# Altium PCB PCB3_TH.PcbDoc
Units mil, origin at the board's own origin, x right, y up, seen from the top; angles counter-clockwise.
Board outline 2365.99 x 2745.01 mil, 2 copper layers (Top Layer, Bottom Layer); 18 components, 13 nets, 87 pads, 2 vias.
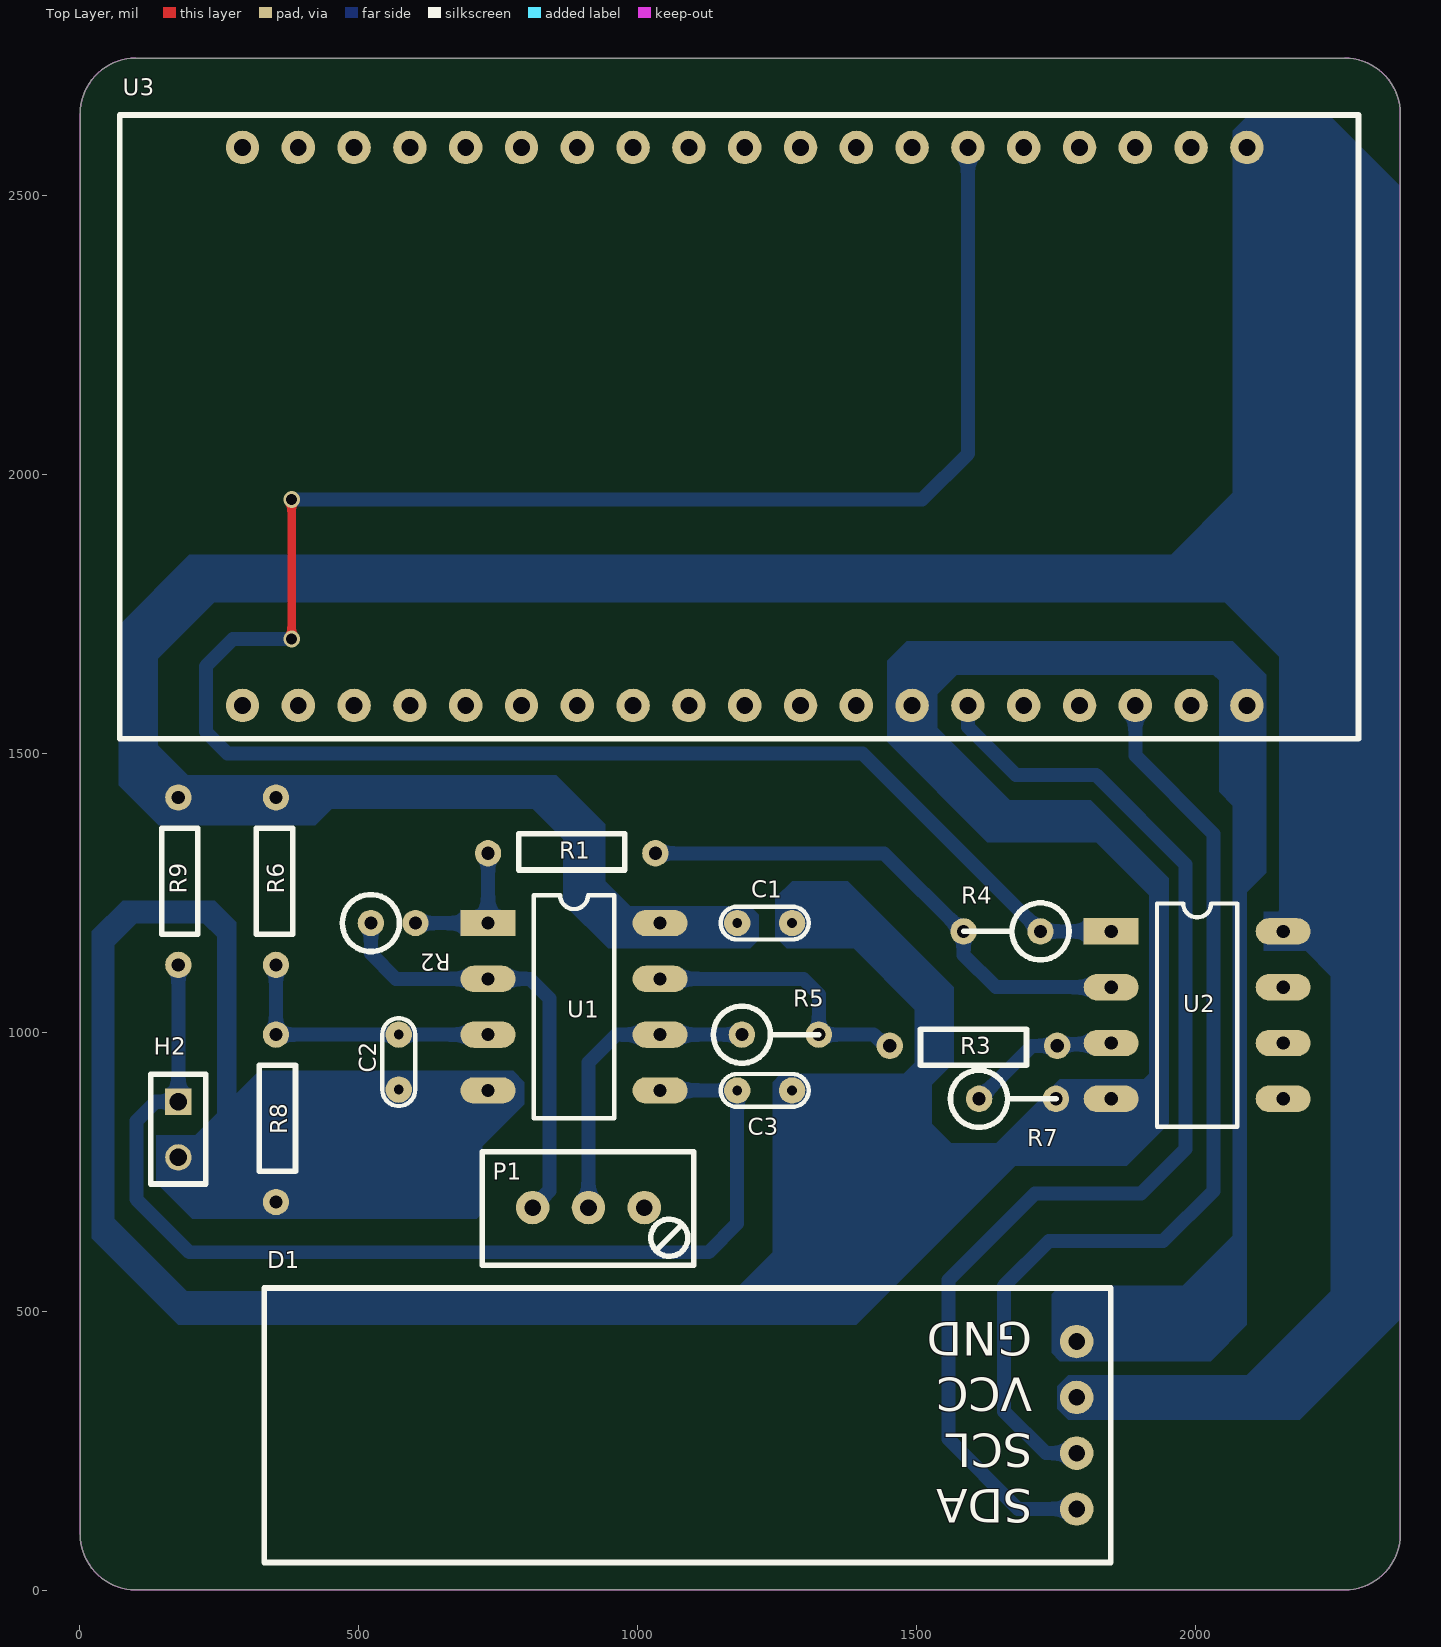
[diagram p0: Top Layer view]
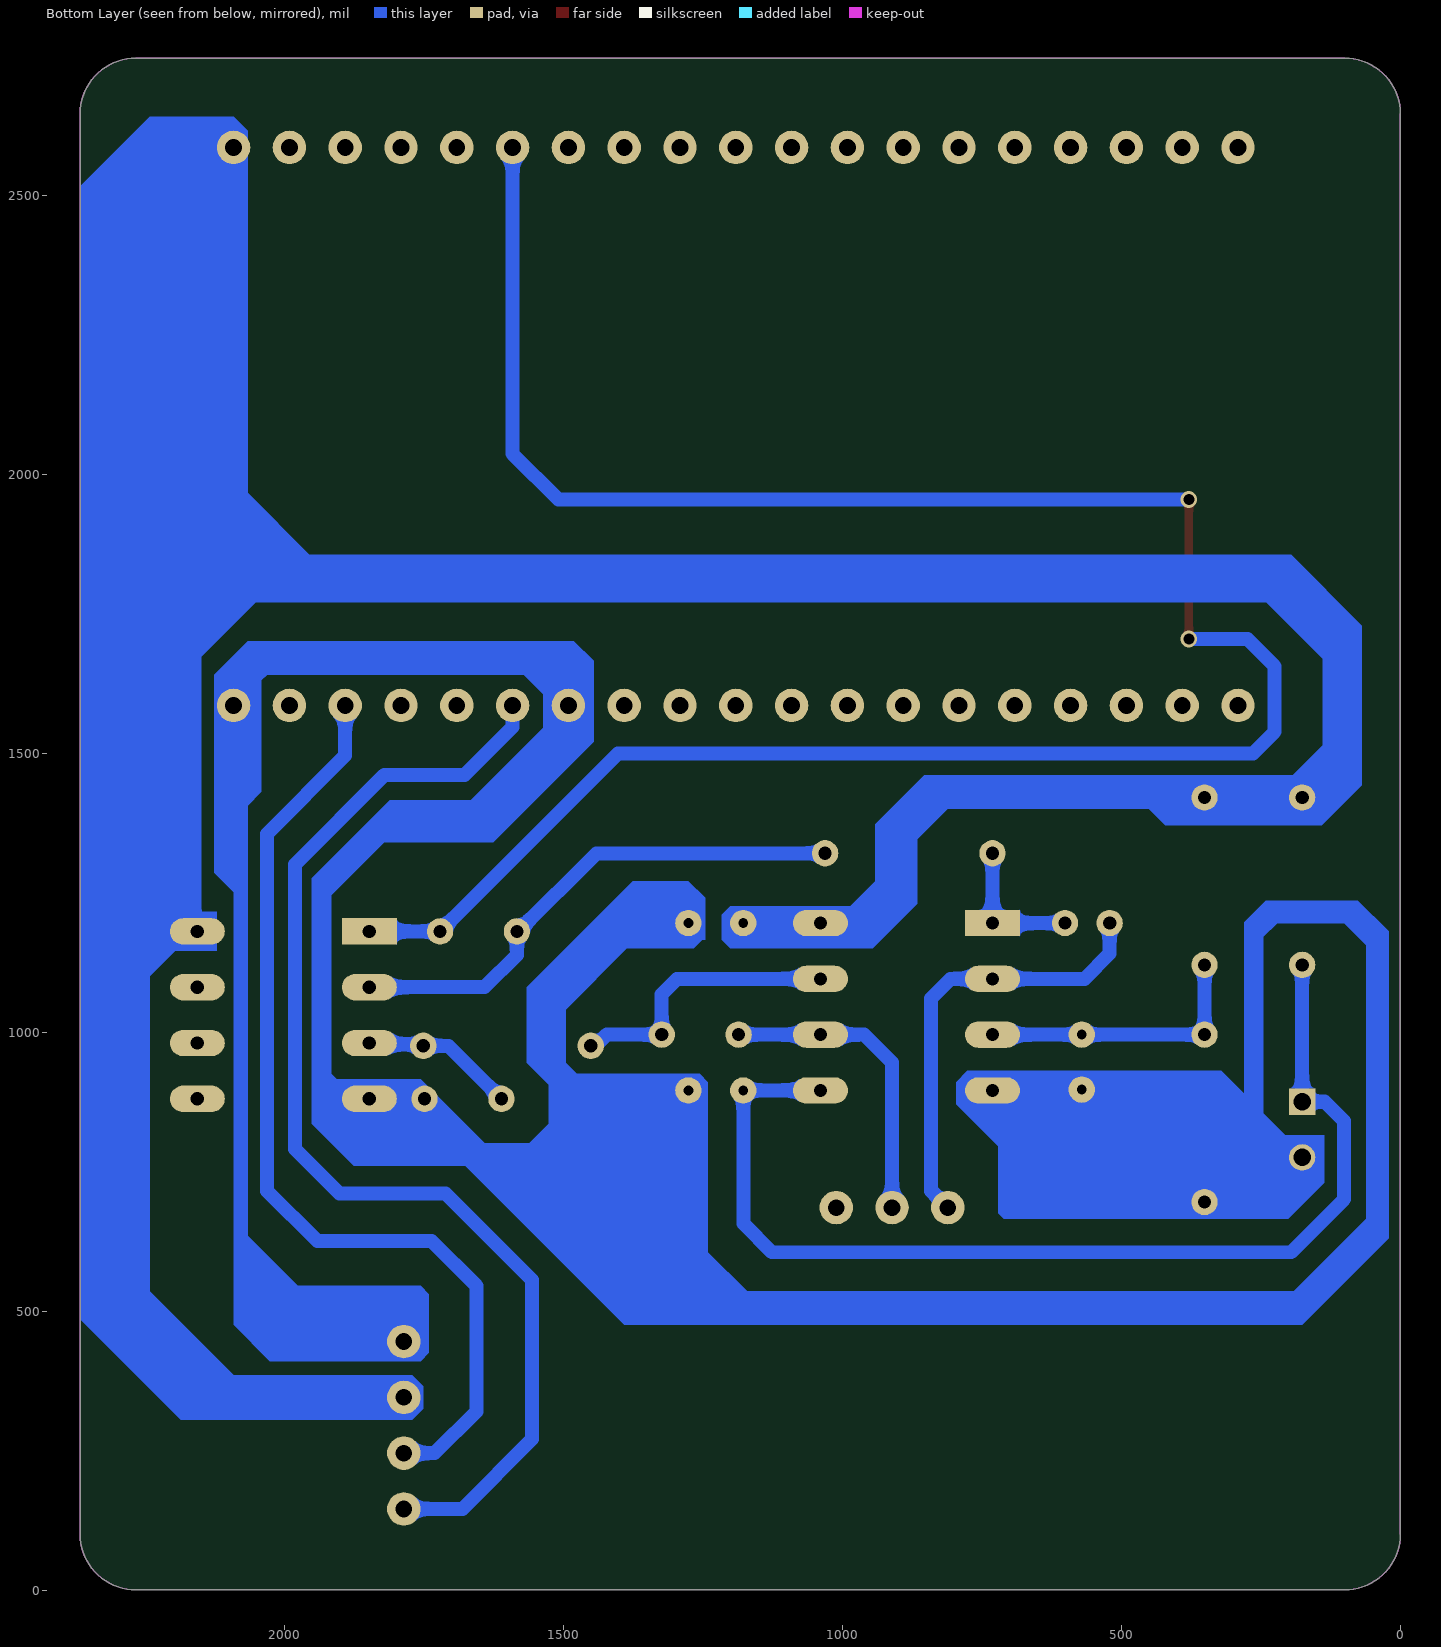
[diagram p1: Bottom Layer view, seen from below]
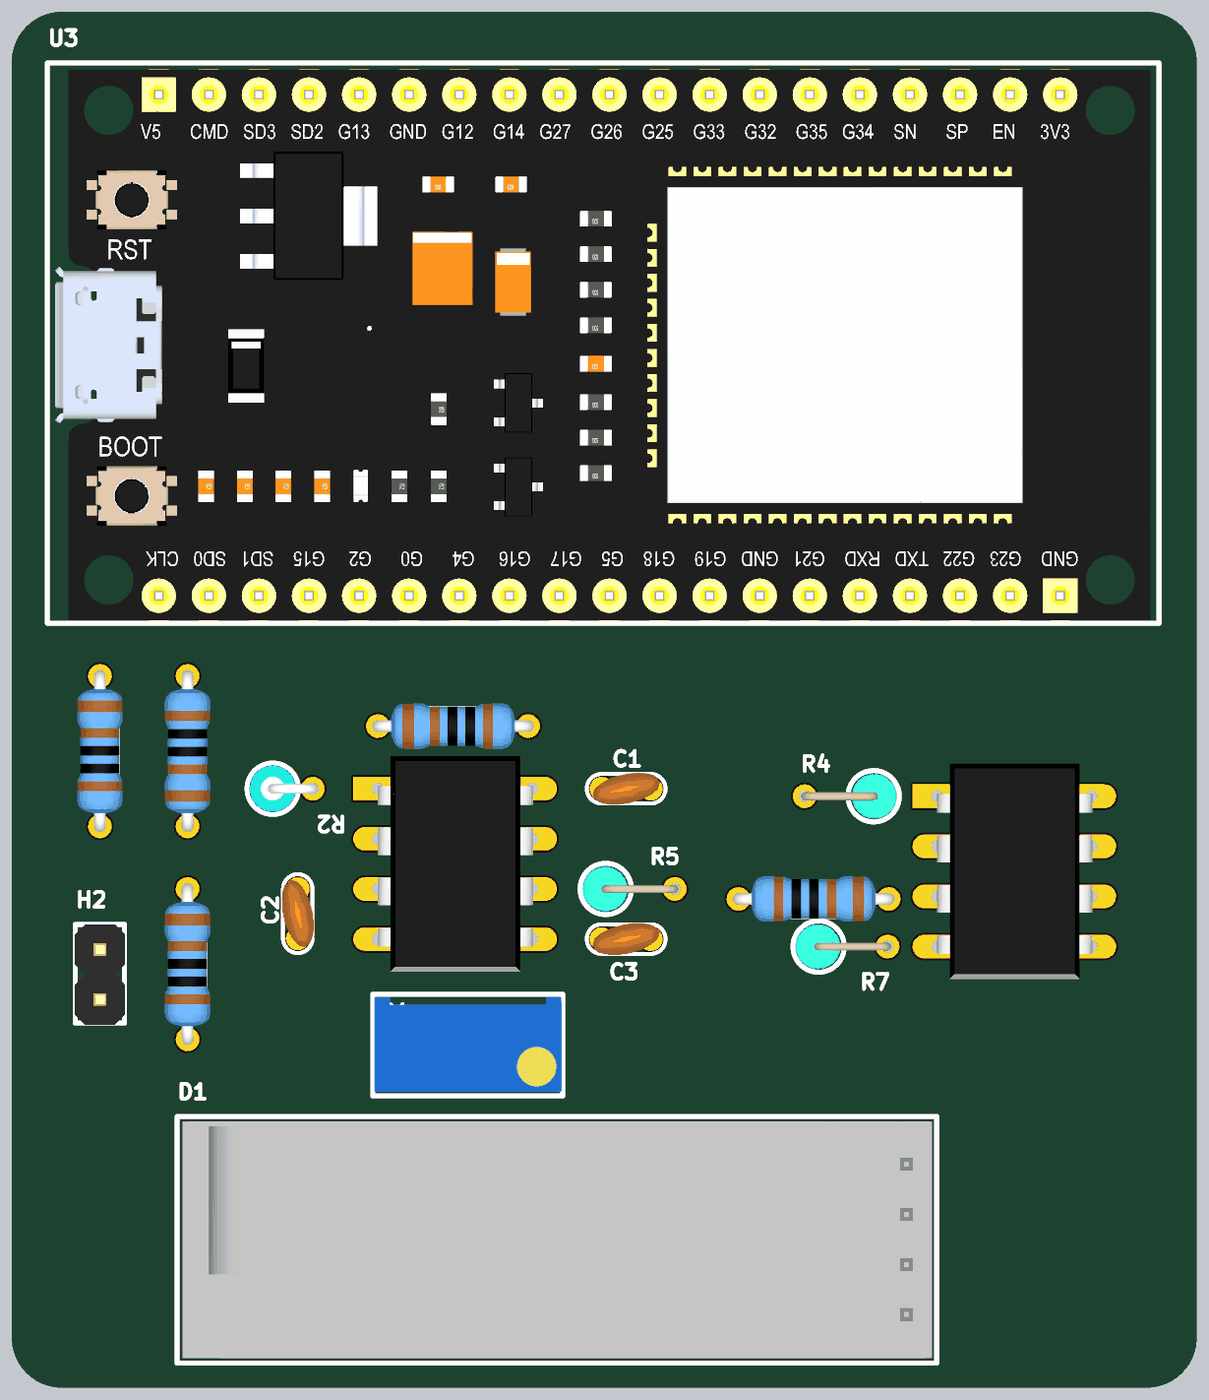
[diagram p2: 3D render of the assembled board from above, using the file's embedded part models]

## Layer stack, top to bottom
Top Solder: solder mask 0.4, Solder Resist, Dk 3.5
Top Layer: signal copper 1.4
Dielectric 1: dielectric 12.6, FR-4, Dk 4.8
Bottom Layer: signal copper 1.4
Bottom Solder: solder mask 0.4, Solder Resist, Dk 3.5

## Board outline
0.98,100.98 0.98,2645.99 cw(c100.98,2645.99) 100.98,2745.99 2266.98,2745.99 cw(c2266.98,2645.99) 2366.98,2645.99 2366.98,100.98 cw(c2266.98,100.98) 2266.98,0.98 100.98,0.98 cw(c100.98,100.98)

## Design rules (kind name [scope] priority, off if disabled: settings)
Clearance [All] p1: gap=10 ignorepadtopadclearanceinfootprint=FALSE except(0: Arc-Hole Track-Hole SMDPad-Hole THPad-Hole Via-Hole Fill-Hole Poly-Hole Region-Hole Text-Hole)
PolygonConnect [All] p1: connectstyle=Relief reliefconductorwidth=10 reliefentries=4 polygonreliefangle="90 Angle" airgapwidth=10
RoutingVias [All] p1: holewidth=28 width=50 viastyle="Through Hole" minholewidth=28 minwidth=50 maxholewidth=28 maxwidth=50
SolderMaskExpansion [All] p1: expansion=4 istentingtop=FALSE
Width Width_1 [All] p1: maxlimit=30 minlimit=10 preferedwidth=20 minimp=50.000000 maximp=50.000000 favimp=50.000000
Width [All] p2: maxlimit=10 minlimit=10 preferedwidth=10
30 further rules are at their usual default settings.

## Components (designator, comment, footprint, x,y, rotation, side; value= is the part's Value field where it differs from the comment)
C1 "1uF" Cap-Rad-Cer-D3.5-L1.5-P2.5 1178.54,1195.98 r0 top
C2 "100nF" Cap-Rad-Cer-D3.5-L1.5-P2.5 571.97,897.56 r90 top
C3 "100nF" Cap-Rad-Cer-D3.5-L1.5-P2.5 1276.97,895.98 r180 top
D1 "SSD1306-0.96-128X32-I2C" SSD1306-0.96-12832-I2C 1786.97,295.98 r90 top
H2 "CONN-2P" HDR-M-2.54-2P 176.97,875.98 r270 top
P1 "10K" 3296X 911.97,685.98 r0 top
R1 "8.2K" "Res Axial 0.3" 1031.97,1320.98 r180 top
R2 "3.9K" "Res Axial 0.3 Vertical"#1 521.97,1195.98 r0 top
R3 "8.2K" "Res Axial 0.3" 1451.97,975.98 r0 top
R4 "47K" "Res Axial 0.3 Vertical"#2 1721.97,1180.98 r180 top
R5 "3.9K" "Res Axial 0.3 Vertical"#2 1186.97,995.98 r0 top
R6 "3.3k" "Res Axial 0.3" 351.97,1420.98 r270 top
R7 "47K" "Res Axial 0.3 Vertical"#2 1611.97,880.98 r0 top
R8 "82R" "Res Axial 0.3" 351.97,695.98 r90 top
R9 "3.3K" "Res Axial 0.3" 176.97,1120.98 r90 top
U1 "LM358" DIP8 731.97,1195.98 r0 top
U2 "LM358" DIP8 1848.7,1180.98 r0 top
U3 "ESP32-DEV-KIT" ESP32-WROOM-32-38PIN 291.97,2085.98 r270 top

## Footprints (in the part's own frame and the unit in brackets; to place one, negate y for a bottom-side part, rotate by r counter-clockwise, add the part's x,y. Pads: shape width x height; smd on the part's side, far side on the other; paste and mask are expansions set on the pad)
3296X [mil]
  round 60 hole 30: 1(100,0) 2(0,0) 3(-100,0)
  silkscreen extent -190,-103 189,100, body extent -187,-94 187,94, height 453
Cap-Rad-Cer-D3.5-L1.5-P2.5 [mm]
  round 1.2 hole 0.45: 1(0,0) 2(2.5,0)
  silkscreen extent -0.75,-0.75 3.25,0.75, body extent -0.6,-1.1 3.14,1.1, height 3.8
DIP8 [mm]
  rect 2.5x1.2 hole 0.6: 1(0,0)
  oval 2.5x1.2 hole 0.6: 2(0,-2.54) 3(0,-5.08) 4(0,-7.62) 5(7.83,-7.62) 6(7.83,-5.08) 7(7.83,-2.54) 8(7.83,0)
  silkscreen extent 2.08,-8.89 5.74,1.27, body extent 0,-9.27 7.87,1.65, height 5.08
ESP32-WROOM-32-38PIN [mil]
  round 60 hole 30: 1(-500,1800) 2(-500,1700) 3(-500,1600) 4(-500,1500) 5(-500,1400) 6(-500,1300) 7(-500,1200) 8(-500,1100) 9(-500,1000) 10(-500,900) 11(-500,800) 12(-500,700) 13(-500,600) 14(-500,500) 15(-500,400) 16(-500,300) 17(-500,200) 18(-500,100) 19(-500,0) 20(500,0) 21(500,100) 22(500,200) 23(500,300) 24(500,400) 25(500,500) 26(500,600) 27(500,700) 28(500,800) 29(500,900) 30(500,1000) 31(500,1100) 32(500,1200) 33(500,1300) 34(500,1400) 35(500,1500) 36(500,1600) 37(500,1700) 38(500,1800)
  silkscreen extent -558,-220 560,2000, body extent -545,-205 555,1983, height 299
HDR-M-2.54-2P [mm]
  rect 1.2x1.2 hole 0.8: 1(0,0)
  round 1.2 hole 0.8: 2(2.54,0)
  silkscreen extent -1.25,-1.25 3.75,1.25, body extent -1.25,-1.27 3.83,1.27, height 8.74
"Res Axial 0.3" [mm]
  round 1.2 hole 0.6: 1(0,0) 2(7.62,0)
  silkscreen extent 1.4,-0.89 6.22,0.76, body extent -0.3,-1.15 7.92,1.15, height 2.3
"Res Axial 0.3 Vertical"#1 [mm]
  round 1.2 hole 0.6: 1(0,0) 2(2.032,0)
  silkscreen extent -1.3,-1.3 1.3,1.3, body extent -1.2,-1.2 2.28,1.2, height 11.61
"Res Axial 0.3 Vertical"#2 [mm]
  round 1.2 hole 0.6: 1(0,0) 2(3.5,0)
  silkscreen extent -1.3,-1.3 3.5,1.3, body extent -1.27,-1.15 3.67,1.15, height 7.72
SSD1306-0.96-12832-I2C [mil]
  round 60 hole 30: 1(-150,0) 2(-50,0) 3(50,0) 4(150,0)
  silkscreen extent -246,-61 246,1456, body extent -236,-51 236,1445, height 248

## Part data
C1 C2 C3: library part CAP-CER, "Ceramic Capacitor"
D1: "SSD1306-0.96inch 128X32 I2C 4P", ComponentLink1Description=WEO012832DWPP3N00008, ComponentLink1URL=https://www.winstar.com.tw/d/447/WEO012832DWPP3N00008.pdf
H2: "Connector 2 Pole"
P1: library part 3296x, "Potentionmeter", ComponentLink1Description="3296x Potentionmeter Square Trimpot Series", ComponentLink1URL=https://www.bourns.com/docs/product-datasheets/3296.pdf
R1 R2 R3 R4 R5 R6 R7 R8 R9: library part Resistor, "Resistor"
U1 U2: "Low-power dual Operational Amplifier", ComponentLink1Description="LM358M Datasheets", ComponentLink1URL=https://www.ti.com/general/docs/suppproductinfo.tsp?distId=10&gotoUrl=https%3A%2F%2Fwww.ti.com%2Flit%2Fgpn%2Flm158-n
U3: library part ESP32-DEVKIT, "ESP32 Dev Kit module 38 Pin"

## Via types
v1: diameter 30, hole 20, Top Layer to Bottom Layer, 2 vias

## Nets (pads, with @x,y where several pads share a name; then routed paths per layer and width w, separated by ;. In a path a pad name is that pad's centre, name@x,y a point inside that pad or via, vN(x,y) a via of type N, cw(c..) or ccw(c..) an arc to the next point about the centre after c; other vN are vias at no path point)
+5: C1.1 D1.3 R6.1 R9.2 U1.8 U2.8 U3.1 | length 3911.9
  Bottom Layer w15: R9.2 R6.1 861.97,1420.98 911.97,1370.98 911.97,1250.98 966.97,1195.98 U1.8 C1.1 ; D1.3 2146.97,345.98 2256.97,455.98 2256.97,1137.2 2215.48,1178.68 2159.27,1178.68 U2.8 2156.97,1995.98 2091.97,2060.98 U3.1
GND: C1.2 C2.1 C3.1 D1.4 H2.2 R7.2 R8.1 U1.4 U2.4 U3.32 U3.38
NetC2_2: C2.2 R6.2 R8.2 U1.3 | length 514.3
  Top Layer w15: C2.2@571.97,989.41 C2.2@575.26,992.7 ; U1.3@728.68,992.7 U1.3
  Bottom Layer w25: R6.2 R8.2 C2.2 U1.3
NetC3_2: C3.2 H2.1 R9.1 U1.5 | length 1988.5
  Bottom Layer w25: R9.1 H2.1 136.97,875.98 101.97,840.98 101.97,700.98 196.97,605.98 1126.97,605.98 1178.54,657.56 C3.2 U1.5
NetD1_1: D1.1 U3.33 | length 2134.6
  Bottom Layer w25: U3.33@1595.48,1582.47 U3.33 1591.97,1547.55 1678.53,1460.98 1821.97,1460.98 1981.97,1300.98 1981.97,790.98 1901.97,710.98 1711.97,710.98 1556.97,555.98 1556.97,270.98 1681.97,145.98 D1.1
NetD1_2: D1.2 U3.36 | length 1759.5
  Bottom Layer w25: D1.2 1731.97,245.98 1656.97,320.98 1656.97,545.98 1736.97,625.98 1941.97,625.98 2031.97,715.98 2031.97,1355.98 1891.97,1495.98 U3.36
NetP1_2: P1.2 R5.1 U1.6 | length 555.7
  Bottom Layer w25: P1.2 911.97,945.98 961.97,995.98 U1.6 R5.1
NetP1_3: P1.3 R2.1 U1.2 | length 805.6
  Bottom Layer w15: P1.3 P1.3@811.97,695.98
  Bottom Layer w25: R2.1 521.97,1140.98 566.97,1095.98 U1.2 806.97,1095.98 841.97,1060.98 841.97,715.98 P1.3
NetR1_1: R1.1 R4.2 U2.2 | length 945.9
  Bottom Layer w25: R1.1 1441.97,1320.98 1581.97,1180.98 R4.2 ; R4.2@1584.17,1185.98 1584.17,1138.78 1641.97,1080.98 U2.2
NetR1_2: R1.2 R2.2 U1.1 | length 255
  Bottom Layer w25: R2.2 U1.1 R1.2
NetR3_1: R3.1 R5.2 U1.7 | length 503.7
  Bottom Layer w25: U1.7 1296.97,1095.98 1324.76,1068.19 R5.2 1423.24,995.98 1443.24,975.98 R3.1
NetR3_2: R3.2 R7.1 U2.3 | length 278.2
  Top Layer w15: R3.2 R3.2@1754.47,978.48 ; U2.3@1846.2,978.48 U2.3
  Bottom Layer w25: R7.1 1706.97,975.98 R3.2 ; R3.2@1754.47,978.48 U2.3@1846.2,978.48
NetR4_1: R4.1 U2.1 U3.6 | length 4114.1
  Top Layer w15: v1(380,1705) v1(380,1955) ; U2.1@1843.7,1185.98 U2.1
  Bottom Layer w25: v1(380,1705) 275,1705 226.21,1656.21 226.21,1538.79 265,1500 1402.95,1500 R4.1 U2.1 ; v1(380,1955) 1510,1955 1591.97,2036.97 U3.6
pads on no net: P1.1 U2.5 U2.6 U2.7 U3.2 U3.3 U3.4 U3.5 U3.7 U3.8 U3.9 U3.10 U3.11 U3.12 U3.13 U3.14 U3.15 U3.16 U3.17 U3.18 U3.19 U3.20 U3.21 U3.22 U3.23 U3.24 U3.25 U3.26 U3.27 U3.28 U3.29 U3.30 U3.31 U3.34 U3.35 U3.37

## Keep-outs
Keep-Out Layer:
  the board outline again, w1.97

## Other copper
Bottom Layer:
  region net GND: 1741.97,425.98 1756.97,410.98 2026.97,410.98 2091.97,475.98 2091.97,1250.98 2126.97,1285.98 2126.97,1500.98 2056.97,1500.98 2041.97,1515.98 2041.97,1430.98 2066.97,1405.98 2066.97,635.98 1976.97,545.98 1756.97,545.98 1741.97,530.98
  region net GND: 1246.97,1240.98 1246.97,1165.98 1251.97,1165.98 1266.97,1150.98 1386.97,1150.98 1496.97,1040.98 1496.97,945.98 1476.97,925.98 1256.97,925.98 1241.97,910.98 1241.97,605.98 1170.98,535 1375.98,535 1641.97,800.98 1561.97,800.98 1526.97,835.98 1526.97,905.98 1566.97,945.98 1566.97,1080.98 1376.97,1270.98 1276.97,1270.98
  region net GND: 1536.97,1545.98 1666.97,1415.98 1811.97,1415.98 1951.97,1275.98 1951.97,835.98 1876.97,760.98 1676.97,760.98 1391.97,475.98 176.97,475.98 21.97,630.98 21.97,1180.98 76.97,1235.98 241.97,1235.98 280.37,1197.58 280.37,879.38 246.97,845.98 246.97,1170.98 221.97,1195.98 101.97,1195.98 61.97,1155.98 61.97,665.98 191.97,535.98 1376.97,535.98 1696.97,855.98 1756.97,915.98 1906.97,915.98 1916.97,925.98 1916.97,1245.98 1821.97,1340.98 1626.97,1340.98 1446.97,1520.98 1446.97,1545.98
  region net GND: 2126.97,1500.98 2126.97,1640.98 2066.97,1700.98 1481.97,1700.98 1446.97,1665.98 1446.97,1545.98 1466.97,1525.98 1471.97,1530.98 1521.97,1530.98 1536.97,1545.98 1536.97,1605.98 1571.97,1640.98 2031.97,1640.98 2041.97,1630.98 2041.97,1515.98 2056.97,1500.98
  region net GND: 776.97,930.98 796.97,910.98 796.97,870.98 721.97,795.98 721.97,675.98 711.97,665.98 201.97,665.98 136.97,730.98 136.97,815.98 206.97,815.98 321.97,930.98
  region net +5: 70,1460.98 70,1729.02 196.97,1855.98 1955.98,1855.98 2066.97,1966.97 2066.97,2615.98 2091.97,2640.98 2241.97,2640.98 2366.97,2515.98 2366.97,485.99 2186.97,305.98 1771.97,305.98 1751.97,325.98 1751.97,365.98 1771.97,385.98 2091.97,385.98 2241.97,535.98 2241.97,1100.98 2196.97,1145.98 2121.97,1145.98 2121.97,1215.98 2151.97,1215.98 2151.97,1670.98 2051.97,1770.98 240.98,1770.98 140,1670 140,1515 194.02,1460.98
  region net +5: 70,1460.98 854.02,1460.98 941.97,1373.03 941.97,1270.98 986.97,1225.98 1201.97,1225.98 1216.97,1210.98 1216.97,1165.98 1201.97,1150.98 946.97,1150.98 866.97,1230.98 866.97,1345.98 811.97,1400.98 451.97,1400.98 421.97,1370.98 141.97,1370.98 70,1442.95

## Text inside footprints (layer, text, board x,y; h text height)
D1: Top Overlay "GND" at 1706.97,480.98 h60 r180; Top Overlay "VCC" at 1706.97,380.98 h60 r180; Top Overlay "SCL" at 1706.97,280.99 h60 r180; Top Overlay "SDA" at 1706.97,180.99 h60 r180